# EAGLE board wa_psu (EAGLE 9.5.1)
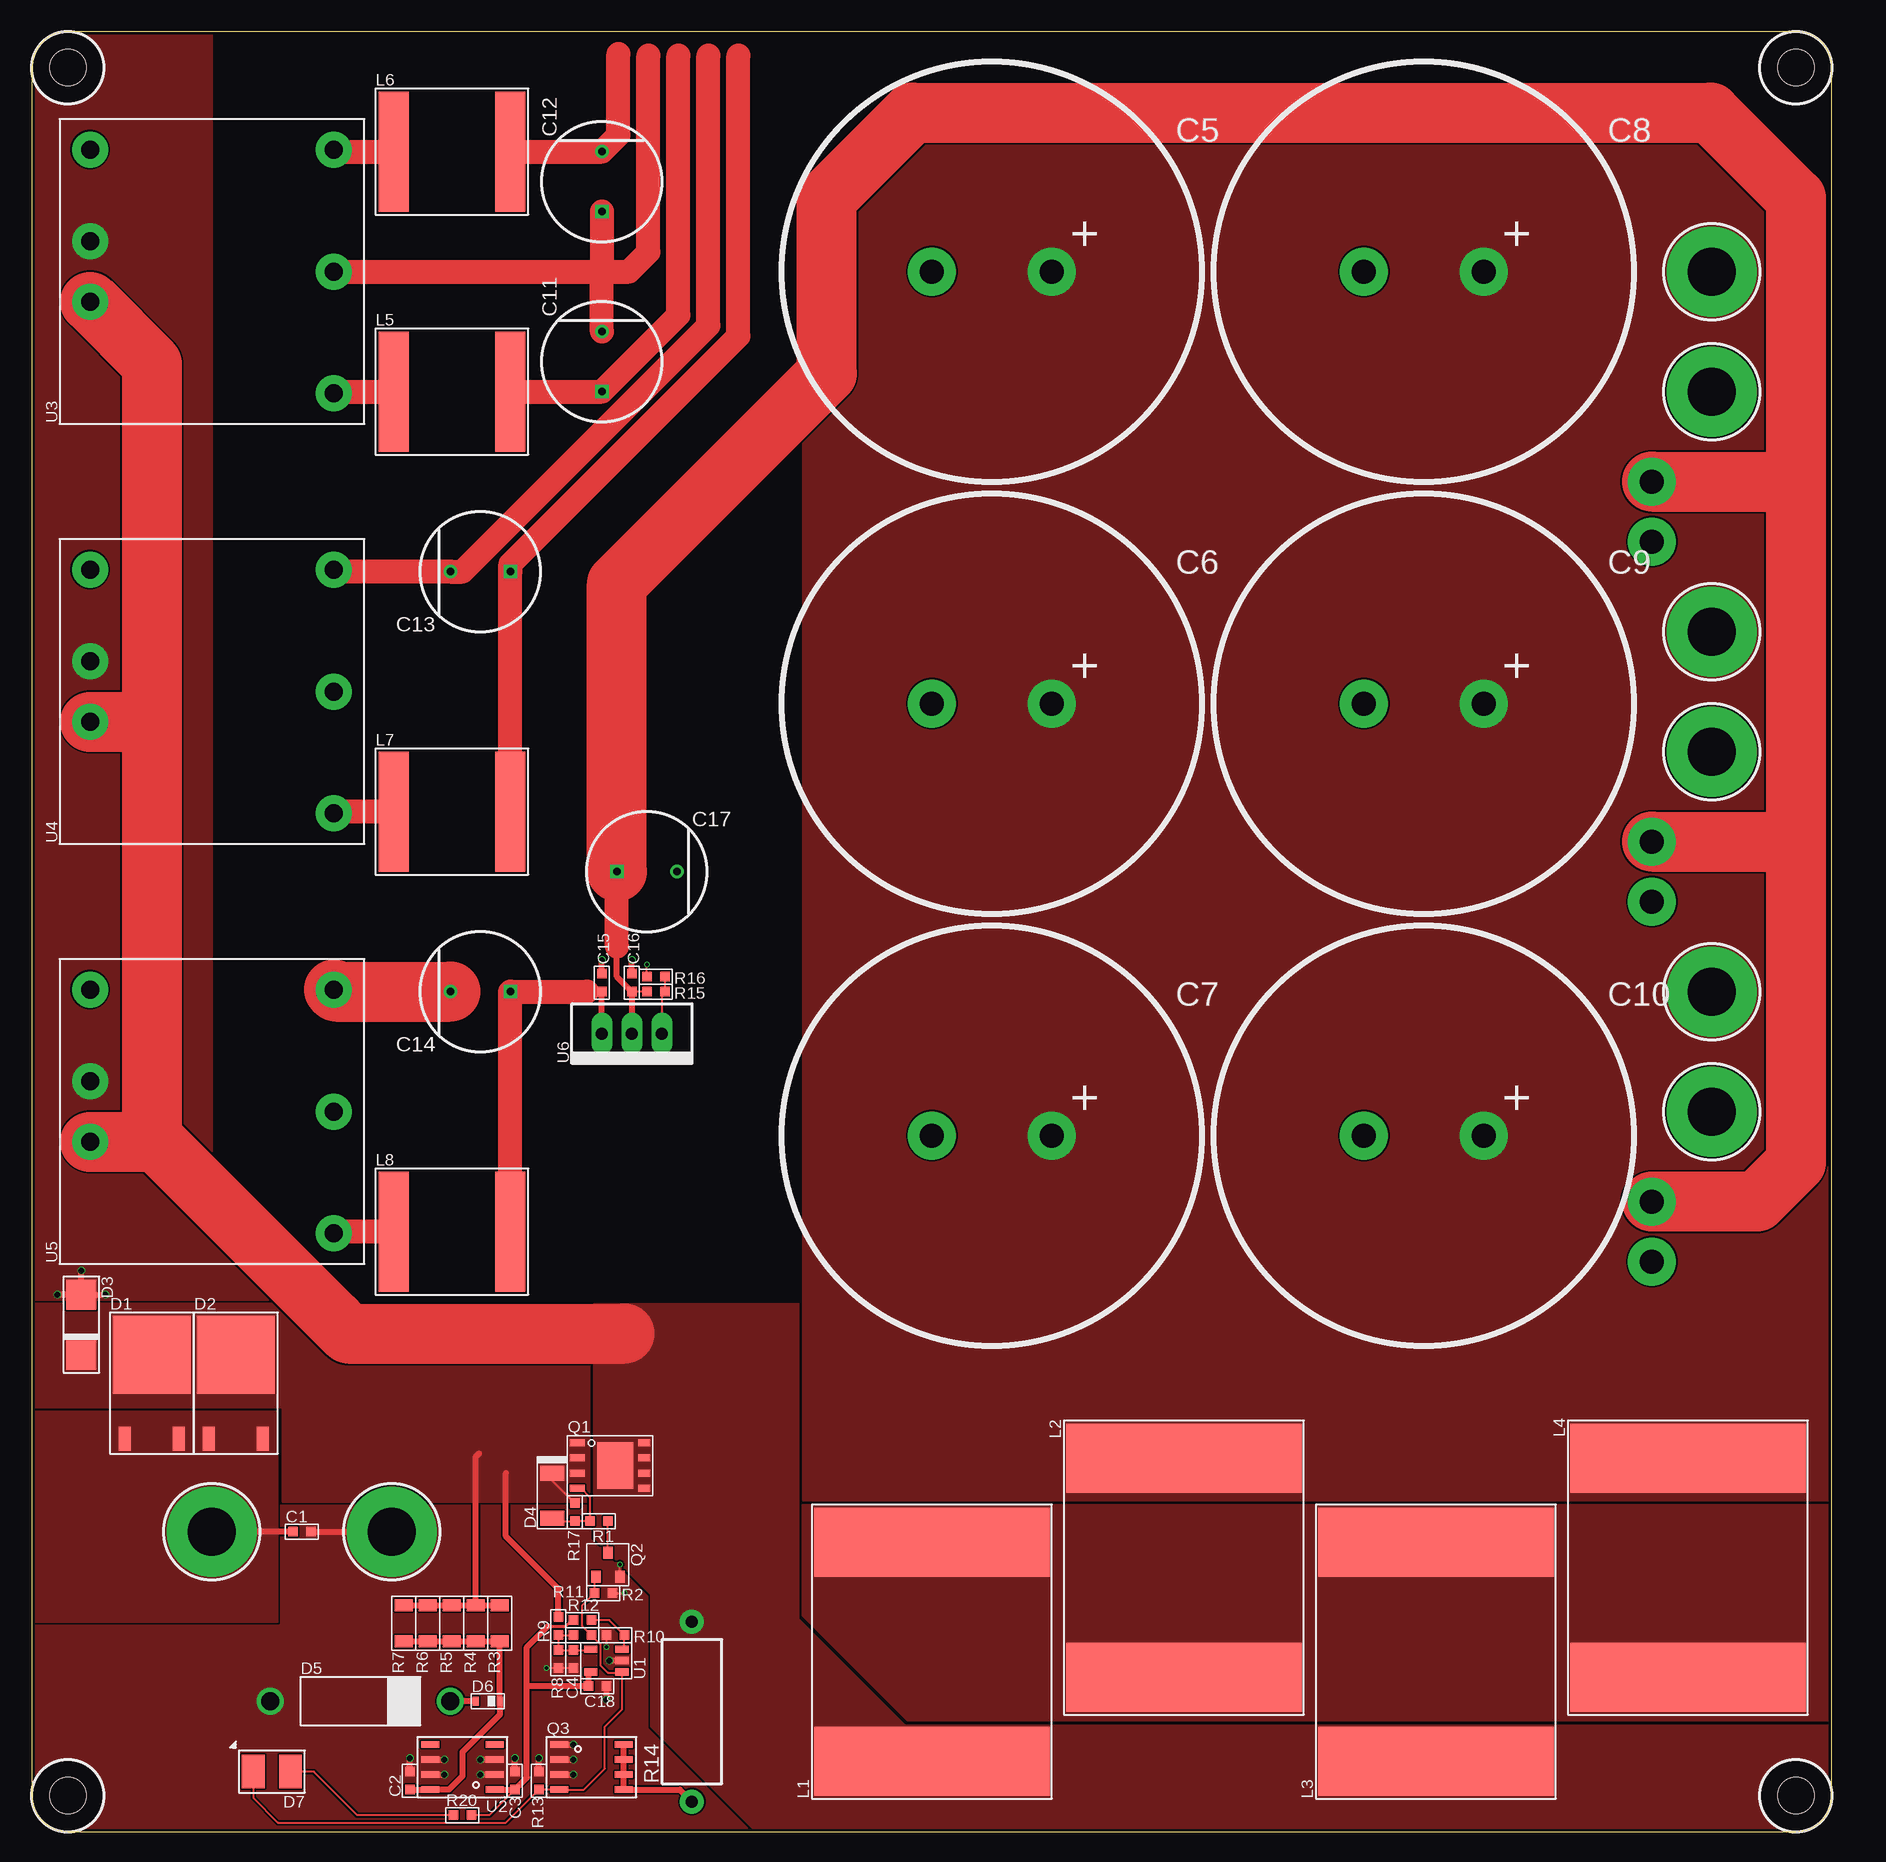
[diagram p0: board, top side]
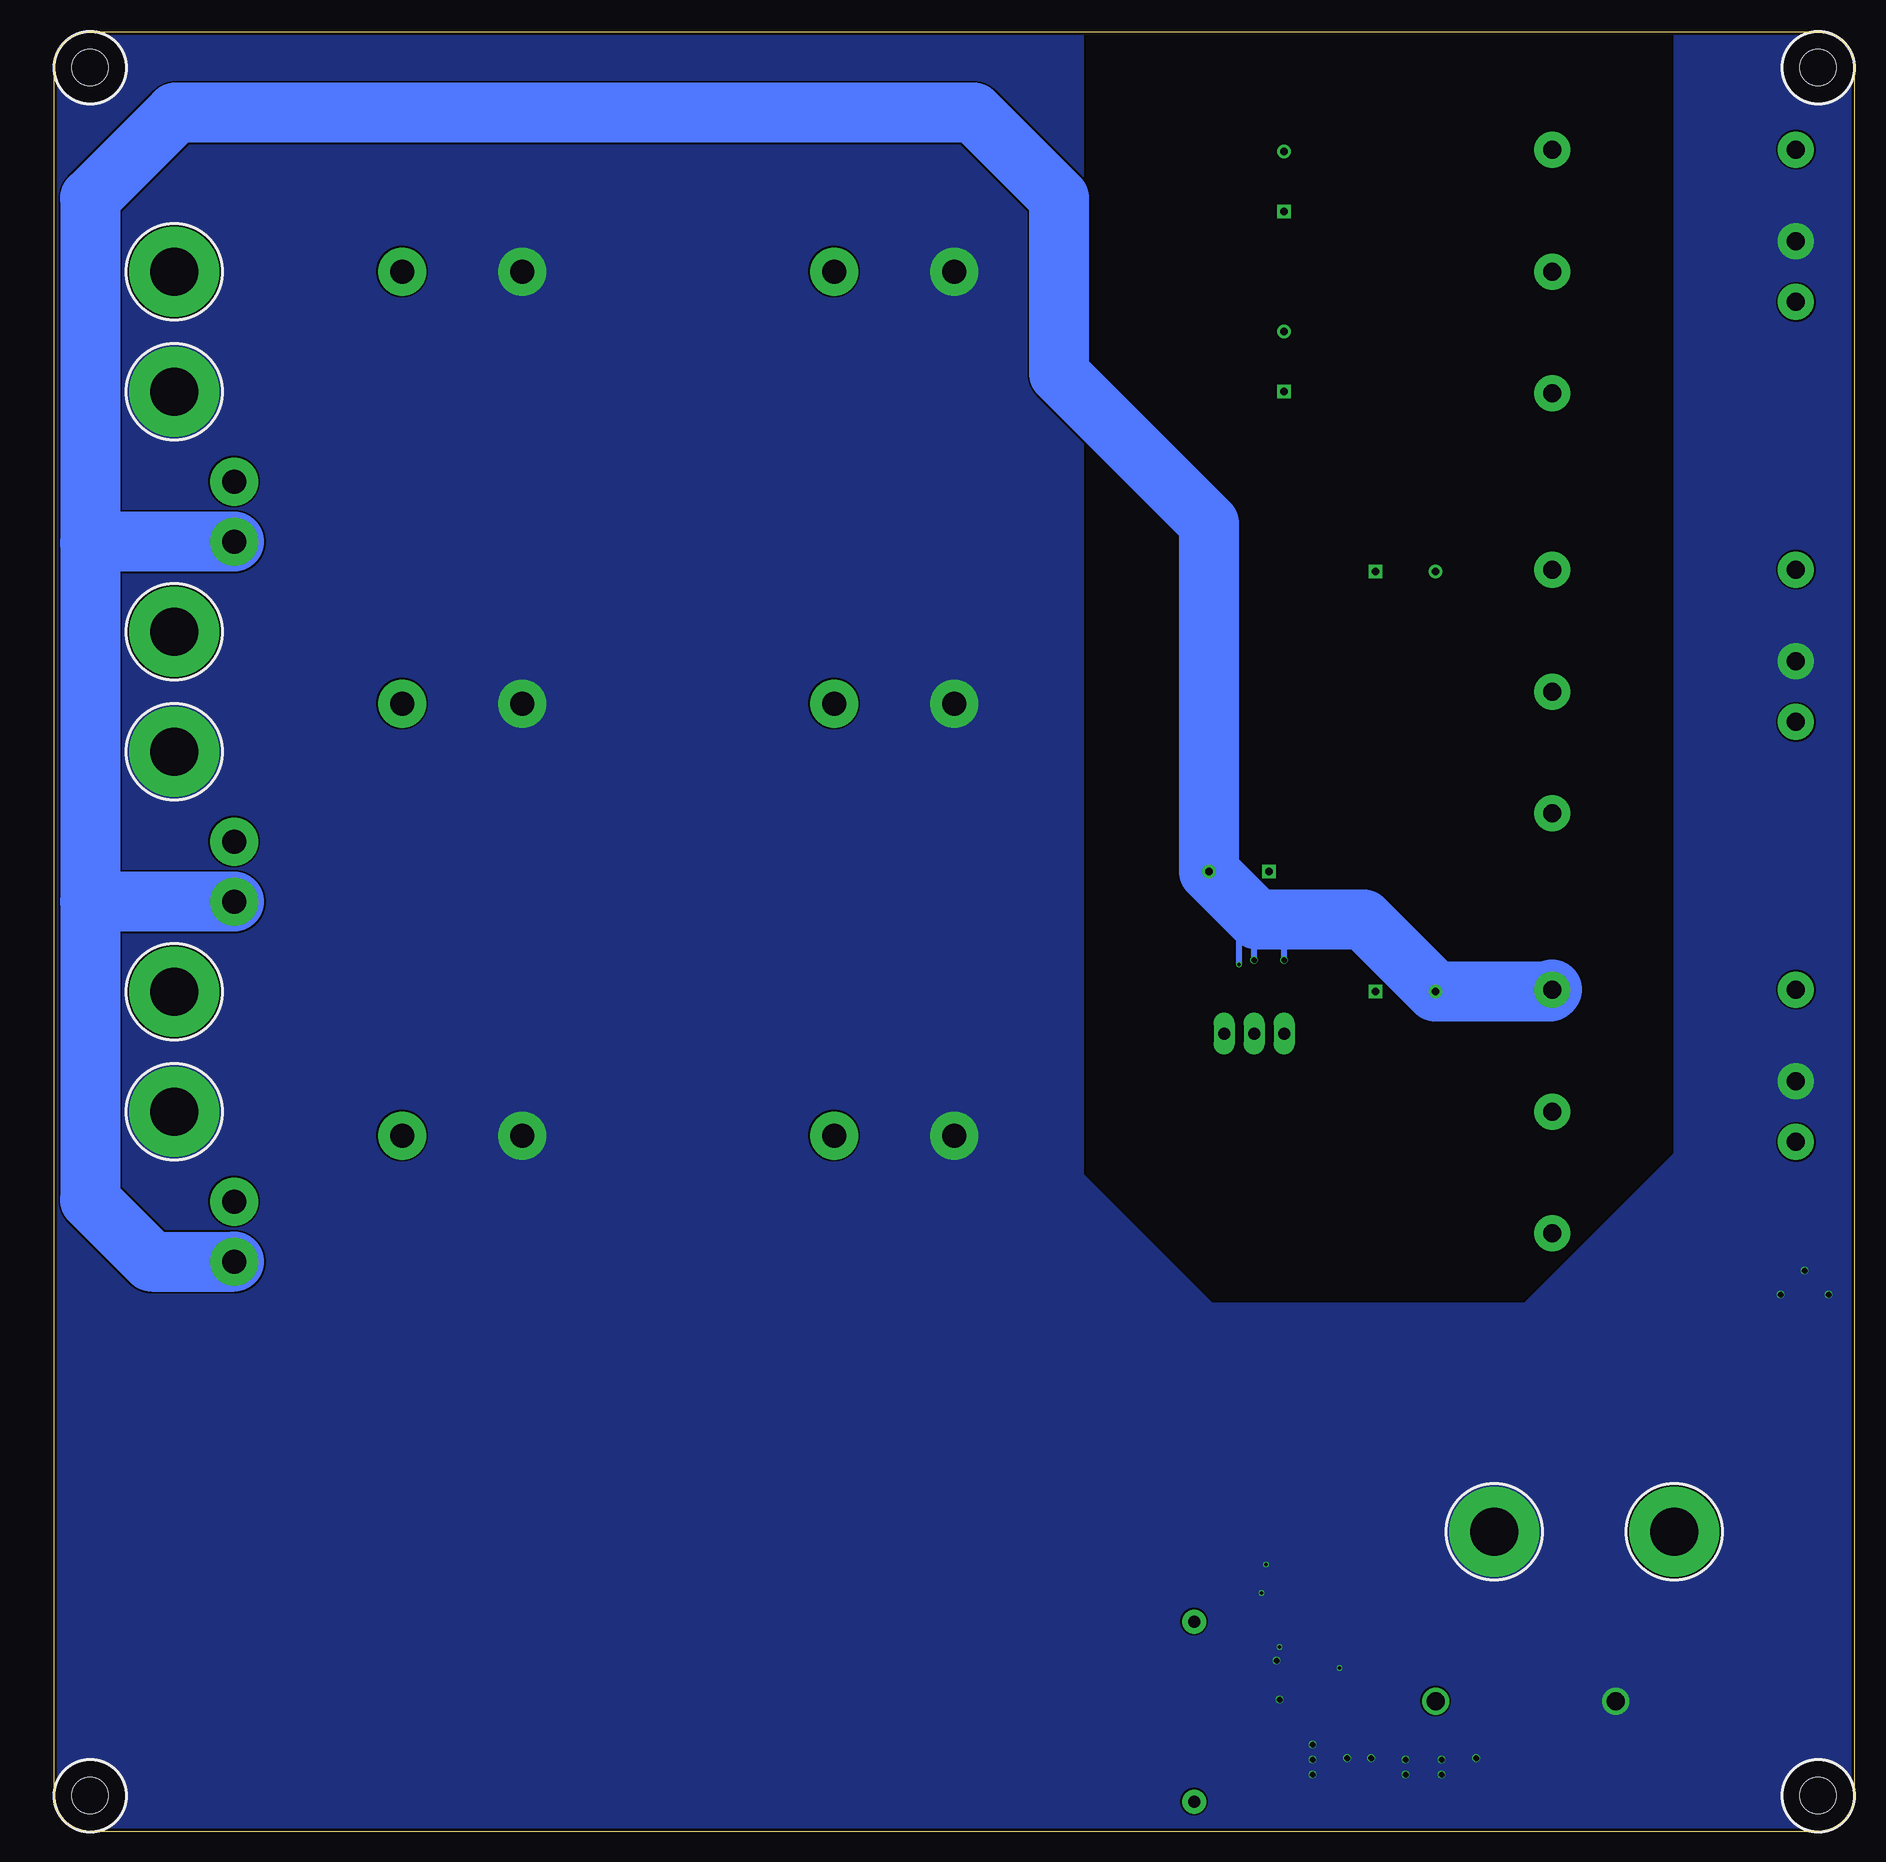
[diagram p1: board, bottom side, seen from below]

Size 150 x 150 mm. Coordinates in mm from the lower left corner, seen from the top.
Outline: 147,150 3,150 arc90 0,147 0,3 arc90 3,0 147,0 arc90 150,3 150,147 arc90 147,150
Copper layers (1*16): Top 0.035mm / dielectric 1.5mm / Bottom 0.035mm
Design rules "myDRC 2 layers": minimum track width 0.15mm, minimum drill 0.15mm, track to track 0.15mm, track to pad 0.15mm, pad to pad 0.15mm, via to via 0.15mm, smd to smd 0mil, copper to edge 0.25mm, drill to drill 0.25mm, minimum pad ring 10mil, minimum via ring 3mil, stop-mask expansion 4mil, vias tented up to drill 0.3mm, thermal gap 10mil

## Footprints (pad centres in the part's own frame; a part is rotated, then mirrored left to right if it is on the bottom)
0603 = smd 0.8 x 0.8: 1 -0.75,0; 2 0.75,0
35MM/10MMCAP = drill 2 pad 4: P$1 5,0; P$2 -5,0
10MM_RADIAL_5MM_PITCH = drill 0.6: 1 2.5,0 | drill 0.6 square: 2 -2.5,0
TO252 = smd 1 x 2: 1 -2.25,-5.25; 3 2.25,-5.25 | smd 6.5 x 6.5: 4 0,1.75
DO214AA = smd 2.5 x 2.5: A -2.5,0; K 2.5,0
SOD80 = smd 1.25 x 2: A 1.875,0; K -1.875,0
017AA-01 = drill 1.5: A -7.5,0; K 7.5,0
SOD_523 = smd 0.5 x 0.75: A -1,0; K 1,0
VLMT3100 = smd 1.9 x 2.8: A -1.55,0; K 1.55,0
MOUNTHOLE_8X4 = drill 4 pad 7.5: 1 0,0
4X2 = drill 2 pad 4: 1 0,0
PA4349.ZZZANLT = smd 5.75 x 19.6: 1 -9.125,0; 2 9.125,0
SRN1060 = smd 2.5 x 10: 1 -4.85,0; 2 4.85,0
MOUNTHOLE_6X3 = hole 3: 0,0
SO8_POWERPAK = smd 1.25 x 0.6: 1 -2.67,1.905; 2 -2.67,0.635; 3 -2.67,-0.635; 4 -2.67,-1.905 | smd 1 x 0.6: 5 2.92,0.635; 6 2.92,-0.635; 7 2.92,-1.905; 8 2.92,1.905 | smd 3 x 3.9: PAD 0.5,0
SOT23-3 = smd 0.8 x 1: 1 -1,-1; 2 0,1; 3 1,-1
SO8 = smd 1.5 x 0.55: 1 -2.7,1.875; 2 -2.7,0.625; 3 -2.7,-0.625; 4 -2.7,-1.875; 5 2.7,-1.875; 6 2.7,-0.625; 7 2.7,0.625; 8 2.7,1.875
1206 = smd 1 x 1.5: 1 1.5,0; 2 -1.5,0
15MM_TH = drill 1 pad 2: 1 -7.5,0; 2 7.5,0
SOT23-5 = smd 0.6 x 1.1: 1 0.95,1.3; 2 0,1.3; 3 -0.95,1.3; 4 -0.95,-1.3; 5 0.95,-1.3
PDQE10 = drill 1.5 pad 3: 1 2.54,10.16; 2 -2.54,10.16; 3 -10.16,-10.16; 4 0,-10.16; 5 10.16,-10.16; 6 10.16,10.16
TO220 = drill 1 pad 1.75 long: 1 -2.5,0; 2 0,0; 3 2.5,0

## Placement (x,y rotation side)
C1  100nF 100V  [0603]  22.5,25 180 top
C2  100nF 100V  [0603]  31.5,4.25 270 top
C3  10uF 10V  [0603]  40.25,4.25 270 top
C4  100nF 16V  [0603]  45.12,14.38 90 top
C5  15mF 63V  [35MM/10MMCAP]  80,130 0 top
C6  15mF 63V  [35MM/10MMCAP]  80,94 0 top
C7  15mF 63V  [35MM/10MMCAP]  80,58 0 top
C8  15mF 63V  [35MM/10MMCAP]  116,130 0 top
C9  15mF 63V  [35MM/10MMCAP]  116,94 0 top
C10  15mF 63V  [35MM/10MMCAP]  116,58 0 top
C11  25V 1000uF  [10MM_RADIAL_5MM_PITCH]  47.5,122.5 90 top
C12  25V 1000uF  [10MM_RADIAL_5MM_PITCH]  47.5,137.5 90 top
C13  25V 1000uF  [10MM_RADIAL_5MM_PITCH]  37.38,105 180 top
C14  25V 1000uF  [10MM_RADIAL_5MM_PITCH]  37.38,70 180 top
C15  1uF 25V  [0603]  47.5,70.75 270 top
C16  1uF 25V  [0603]  50,70.75 270 top
C17  25V 1000uF  [10MM_RADIAL_5MM_PITCH]  51.25,80 0 top
C18  100nF 16V  [0603]  47.12,12.12 180 top
D1  150V 35A  [TO252]  10,38 0 top
D2  150V 35A  [TO252]  17,38 0 top
D3  ES2D  [DO214AA]  4.12,42.25 270 top
D4  8V2  [SOD80]  43.38,28 270 top
D5  43V 5W  [017AA-01]  27.38,10.88 0 top
D6  BZX585-C10  [SOD_523]  38,10.88 0 top
D7  RED STATUS  [VLMT3100]  20,5 180 top
HOLE1  4mm ID  [MOUNTHOLE_8X4]  15,25 90 top
HOLE2  4mm ID  [MOUNTHOLE_8X4]  30,25 90 top
HOLE3  4mm ID  [MOUNTHOLE_8X4]  140,120 0 top
HOLE4  4mm ID  [MOUNTHOLE_8X4]  140,130 0 top
HOLE5  4mm ID  [MOUNTHOLE_8X4]  140,90 0 top
HOLE6  4mm ID  [MOUNTHOLE_8X4]  140,100 0 top
HOLE7  4mm ID  [MOUNTHOLE_8X4]  140,60 0 top
HOLE8  4mm ID  [MOUNTHOLE_8X4]  140,70 0 top
HOLE9  MOUNTHOLE_METAL4X2  [4X2]  135,107.5 0 top
HOLE10  MOUNTHOLE_METAL4X2  [4X2]  135,112.5 0 top
HOLE11  MOUNTHOLE_METAL4X2  [4X2]  135,77.5 0 top
HOLE12  MOUNTHOLE_METAL4X2  [4X2]  135,82.5 0 top
HOLE13  MOUNTHOLE_METAL4X2  [4X2]  135,47.5 0 top
HOLE14  MOUNTHOLE_METAL4X2  [4X2]  135,52.5 0 top
L1  PA4349.823ANLT  [PA4349.ZZZANLT]  75,15 90 top
L2  PA4349.823ANLT  [PA4349.ZZZANLT]  96,22 90 top
L3  PA4349.823ANLT  [PA4349.ZZZANLT]  117,15 90 top
L4  PA4349.823ANLT  [PA4349.ZZZANLT]  138,22 90 top
L5  470uH  [SRN1060]  35,120 0 top
L6  470uH  [SRN1060]  35,140 0 top
L7  470uH  [SRN1060]  35,85 0 top
L8  470uH  [SRN1060]  35,50 0 top
MECH1  6mm x 3mm  [MOUNTHOLE_6X3]  3,3 0 top
MECH2  6mm x 3mm  [MOUNTHOLE_6X3]  147,3 0 top
MECH3  6mm x 3mm  [MOUNTHOLE_6X3]  3,147 0 top
MECH4  6mm x 3mm  [MOUNTHOLE_6X3]  147,147 0 top
Q1  SI7489DP  [SO8_POWERPAK]  48.12,30.5 0 top
Q2  CPH3459  [SOT23-3]  48,22.25 0 top
Q3  SI4848ADY  [SO8]  46.62,5.38 0 top
R1  20k  [0603]  47.25,25.88 180 top
R2  10k  [0603]  47.62,19.88 180 top
R3  4k7  [1206]  39,17.38 270 top
R4  4k7  [1206]  37,17.38 270 top
R5  4k7  [1206]  35,17.38 270 top
R6  4k7  [1206]  33,17.38 270 top
R7  4k7  [1206]  31,17.38 270 top
R8  4.3k  [0603]  43.88,14.38 90 top
R9  82k  [0603]  43.88,17.12 90 top
R10  10k  [0603]  48.62,16.38 0 top
R11  10k  [0603]  45.88,17.62 180 top
R12  3.9k  [0603]  45.88,16.38 0 top
R13  10k  [0603]  42.25,4.25 270 top
R14  100R  [15MM_TH]  55,10 90 top
R15  240R  [0603]  52,70 180 top
R16  2.0k  [0603]  52,71.25 0 top
R17  100k  [0603]  45.25,26.62 270 top
R20  1.0k  [0603]  35.88,1.38 0 top
U1  LMV7219  [SOT23-5]  47.88,14.25 270 top
U2  LM2936  [SO8]  35.88,5.38 180 top
U3  DCDC +/-15V  [PDQE10]  15,130 90 top
U4  DCDC 15V  [PDQE10]  15,95 90 top
U5  DCDC 15V  [PDQE10]  15,60 90 top
U6  LM317  [TO220]  50,66.5 180 top

## Library data of the parts
C1 C2 = CAPACITORS; DIGIKEY: 478-10047-1-ND; HEIGHT: 1; PRICE_PER: 0.14
C3 = CAPACITORS; DIGIKEY: 490-10474-1-ND; HEIGHT: 0.95; PRICE_PER: 0.17
C4 C18 = CAPACITORS; DIGIKEY: 1276-6582-1-ND; HEIGHT: 1; PRICE_PER: 0.08
C5-C10 = PASSIVES
C11-C14 C17 = CAPACITORS; DIGIKEY: 1189-1245-ND; HEIGHT: 22; PRICE_PER: 0.53
C15 C16 = CAPACITORS; DIGIKEY: 1276-1102-1-ND; HEIGHT: 1; PRICE_PER: 0.08
D1 D2 = DIODES; DIGIKEY: V35PW15-M3/IGICT-ND; HEIGHT: 3; PRICE_PER: 0.97
D3 = DIODES; DIGIKEY: ES2DFSCT-ND; HEIGHT: 2.5; PRICE_PER: 0.32
D4 = DIODES; DIGIKEY: BZT55C8V2-GS08GICT-ND; HEIGHT: 2; PRICE_PER: 0.16
D5 = DIODES; FARNELL: 9558241; PRICE_PER: 0.323
D6 = DIODES; FARNELL: 1907632; PRICE_PER: 0.08
D7 = OPTO; DIGIKEY: VLMT3100-GS08CT-ND; HEIGHT: 2; PRICE_PER: 0.225
HOLE1-HOLE8 = MISC; PRICE_PER: 0
HOLE9-HOLE14 MECH1-MECH4 = MISC
L1-L4 = INDUCTORS
L5-L8 = INDUCTORS; DIGIKEY: SRN1060-471MCT-ND; HEIGHT: 6; PRICE_PER: 0.72
Q1 = TRANSISTORs; DIGIKEY: SI7489DP-T1-E3CT-ND; HEIGHT: 2; PRICE_PER: 2.16
Q2 = TRANSISTORs; DIGIKEY: CPH3459-TL-WOSCT-ND; HEIGHT: 1.2; PRICE_PER: 0.4
Q3 = TRANSISTORs; DIGIKEY: SI4848ADY-T1-GE3CT-ND; HEIGHT: 2; PRICE_PER: 0.61
R1 = r_0603; DIGIKEY: P20.0KHCT-ND; PRICE_PER: 0.10000
R2 R10 R11 R13 = r_0603; DIGIKEY: P10.0KHCT-ND; PRICE_PER: 0.10000
R3-R7 = RESISTORS; FARNELL: 1739021; HEIGHT: 0.65; PRICE_PER: 0.1706
R8 = r_0603; DIGIKEY: P4.30KHCT-ND; PRICE_PER: 0.10000
R9 = r_0603; DIGIKEY: P82.0KHCT-ND; PRICE_PER: 0.10000
R12 = r_0603; DIGIKEY: P3.90KHCT-ND; PRICE_PER: 0.10000
R14 = RESISTORS; DIGIKEY: P100W-3CT-ND; HEIGHT: 5; PRICE_PER: 0.38
R15 = r_0603; DIGIKEY: P240HCT-ND; PRICE_PER: 0.10000
R16 = r_0603; DIGIKEY: P2.00KHCT-ND; PRICE_PER: 0.10000
R17 = r_0603; DIGIKEY: P100KHCT-ND; PRICE_PER: 0.10000
R20 = r_0603; DIGIKEY: P1.00KHCT-ND; PRICE_PER: 0.10000
U1 = ICs; DIGIKEY: LMV7219M5/NOPBCT-ND; HEIGHT: 1.2; PRICE_PER: 1.96
U2 = ICs; DIGIKEY: LM2936HVMAX-5.0/NOPBCT-ND; HEIGHT: 1.5; PRICE_PER: 1.56
U3 = ICs; DIGIKEY: 102-4868-ND; HEIGHT: 12; PRICE_PER: 13.64
U4 U5 = ICs; DIGIKEY: PDQE10-Q48-S15-D; HEIGHT: 12; PRICE_PER: 12.18
U6 = ICs; DIGIKEY: 497-1575-5-ND; HEIGHT: 19; PRICE_PER: 0.5

## Nets
5V: C3.2 C18.2 R11.2 R20.2 U1.5 U2.1
AMP_12V: C16.2 C17.2 HOLE10.1 HOLE12.1 HOLE14.1 R15.2 U6.2
DSP_AGND: C11.1 C12.2 U3.4
DSP_DGND: C13.1 U4.5
DSP_VA+: C11.2 L5.2
DSP_VA-: C12.1 L6.2
DSP_VD+: C13.2 L7.2
GND: C1.1 C2.1 C3.1 C4.1 C5.P$2 C6.P$2 C7.P$2 C8.P$2 C9.P$2 C10.P$2 C18.1 D3.A D5.A HOLE2.1 HOLE3.1 HOLE5.1 HOLE7.1 Q2.3 Q3.1 Q3.2 Q3.3 R2.1 R8.1 R10.1 R13.1 U1.2 U2.2 U2.3 U2.6 U2.7 U3.1 U4.1 U5.1
N$1: C1.2 D1.1 D1.3 D2.1 D2.3 HOLE1.1
N$2: C4.2 R8.2 R9.1 R12.1 U1.4
N$3: D4.A Q1.4 R1.2 R17.2
N$4: L1.2 L2.1 L3.2 L4.1
N$5: Q2.2 R1.1
N$6: D5.K D6.A
N$7: C2.2 D6.K R3.1 R4.1 R5.1 R6.1 R7.1 U2.8
N$8: D1.4 D2.4 D3.K D4.K Q1.1 Q1.2 Q1.3 R3.2 R4.2 R5.2 R6.2 R7.2 R9.2 R17.1
N$9: R10.2 R11.1 U1.3
N$11: D7.A R20.1
N$12: L5.1 U3.3
N$13: L6.1 U3.5
N$14: R15.1 R16.2 U6.1
N$18: C14.2 C15.2 L8.2 U6.3
N$20: L8.1 U5.3
N$22: L7.1 U4.3
N$23: Q3.5 Q3.6 Q3.7 Q3.8 R14.1
PGND: C14.1 C15.1 C16.1 C17.1 HOLE9.1 HOLE11.1 HOLE13.1 R16.1 U5.5
PSU_VIN_OVERVOLT: D7.K Q2.1 Q3.4 R2.2 R12.2 R13.2 U1.1
VIN: L1.1 L3.1 Q1.5 Q1.6 Q1.7 Q1.8 Q1.PAD R14.2 U3.2 U4.2 U5.2
VOUT: C5.P$1 C6.P$1 C7.P$1 C8.P$1 C9.P$1 C10.P$1 HOLE4.1 HOLE6.1 HOLE8.1 L2.2 L4.2

## Tracks (layer width: path | path; a pad name or v marks a point on that pad's centre or on a via)
5V
  Top 0.15: C3.2 38.12,1.38 R20.2
  Top 0.25: R11.2 45,17.62 44.5,17.12 43,17.12
  Top 0.5: U2.1 C3.2 41.25,4.5 41.25,12 | U1.5 46.38,13.1 C18.2 41.38,12.12 41.25,12 | 41.25,12 41.25,15.38 43,17.12
AMP_12V
  Top 0.15: R15.2 C16.2
  Top 0.5: U6.2 C16.2 48.75,71.25 48.75,73.75
  Top 2: 48.75,73.75 C17.2
  Top 5: C17.2 48.75,104 66.25,121.5 66.25,136.12 73.38,143.25 139.88,143.25 147,136.12 147,112.5 | 147,112.5 147,82.5 | HOLE10.1 147,112.5 | HOLE12.1 147,82.5 | HOLE14.1 143.75,52.5 147,55.75 147,82.5
DSP_AGND
  Top 2: U3.4 47.5,130 | 47.5,130 49.75,130 51.38,131.62 51.38,148 | C11.1 47.5,130 | C12.2 47.5,130
DSP_DGND
  Top 2: 56.38,148 56.38,125.5 35.88,105 C13.1 25.32,105 U4.5
DSP_VA+
  Top 2: L5.2 C11.2 53.88,126.38 53.88,148
DSP_VA-
  Top 2: L6.2 C12.1 48.88,141.38 48.88,148.12
DSP_VD+
  Top 2: L7.2 39.85,99.97 C13.2 39.88,105.62 58.88,124.62 58.88,148
GND  (via drill 0.3, 0.5)
  Top 0.15: v42.88,13.62 R8.1 C4.1 | R10.1 v47.88,15.38 | Q2.3 v49,22.25 | R2.1 v49.38,19.88
  Top 0.5: U2.7 v34.38,4.75 | U2.6 v34.38,6 | C2.1 v31.5,6.12 | U2.2 v37.38,4.75 | U2.3 v37.38,6 | C3.1 v40.25,6.12 | U1.2 v48.12,14.25 | C18.1 v47.88,11 | Q3.1 v45.12,7.25 | Q3.2 v45.12,6 | Q3.3 v45.12,4.75 | R13.1 v42.25,6.12 | D3.A v6.12,44.75 | D3.A v2.12,44.75 | D3.A v4.12,46.75 | C1.1 HOLE2.1
  pour Bottom (no thermals): 15,150 15,56.5 27.5,44 53.5,44 64.25,54.75 64.25,150 150,150 150,0 0,0 0,150
  pour Top (rank 6, no thermals): 15,150 15,56.5 27.5,44 53.5,44 64.12,54.62 64.12,150 150,150 150,0 0,0 0,150
N$1
  Top 0.5: C1.2 HOLE1.1
  pour Top (no thermals): 0,17.5 20.5,17.5 20.5,35 0,35
N$2
  Top 0.15: U1.4 46.5,15.12 C4.2 R8.2 R9.1 R12.1
N$3
  Top 0.15: D4.A 43.62,25.88 R17.2 45.88,25.88 R1.2 46.5,27.88 45.78,28.59 Q1.4 45.83,28.59 45.88,28.55
N$4
  pour Top (no thermals): 64.25,27.25 150,27.25 150,9.25 73,9.25 64.25,18
N$5
  Top 0.15: Q2.2 R1.1
N$6
  Top 0.5: D6.A D5.K
N$7
  Top 0.5: R7.1 R6.1 R5.1 R4.1 R3.1 D6.K 39,9.75 35.88,6.62 35.88,4.62 34.75,3.5 U2.8 C2.2
N$8
  Top 0.15: R17.1 43.38,29.25 D4.K
  Top 0.5: R7.2 R6.2 R5.2 R4.2 | R4.2 R3.2 | R4.2 37,31.25 37.25,31.5 | R9.2 43.88,20.25 39.5,24.62 39.5,29.88
  pour Top (no thermals): 0,35.38 20.88,35.38 20.88,27.5 46.5,27.5 46.5,41 24.25,41 21.25,44 0,44
N$9
  Top 0.15: U1.3 49.38,15.4 49.38,16.12 R10.2 48.12,17.62 R11.1
N$11
  Top 0.15: R20.1 27.12,1.38 23.5,5 D7.A
N$12
  Top 2: U3.3 25.32,120 L5.1
N$13
  Top 2: U3.5 25.32,140 L6.1
N$14
  Top 0.15: R16.2 R15.1 52.5,69.75 U6.1
N$18
  Top 0.5: U6.3 C15.2 46.25,70
  Top 2: L8.2 39.85,69.97 C14.2 46.25,70
N$20
  Top 2: L8.1 25.32,50 U5.3
N$22
  Top 2: L7.1 25.32,85 U4.3
N$23
  Top 0.5: R14.1 54,3.5 Q3.5 Q3.6 Q3.7 Q3.8
PGND  (via drill 0.3, 0.5)
  Top 0.15: R16.1 v51.25,72.25
  Top 0.5: C15.1 v47.5,72.62 | C16.1 v50,72.62
  Top 5: U5.5 25.32,70 C14.1
  Bottom 0.5: v47.5,72.62 47.5,73.75 49.75,76 | v50,72.62 50,75.75 49.75,76 | v51.25,72.25 51.25,74.5 49.75,76
  Bottom 5: U5.5 25.32,70 C14.1 40.88,76 49.75,76 C17.1 53.75,109 66.25,121.5 66.25,136.12 73.38,143.25 139.88,143.25 147,136.12 147,107.38 | 147,107.38 147,77.5 | HOLE9.1 146.88,107.5 147,107.38 | HOLE11.1 147,77.5 | HOLE13.1 141.88,47.5 147,52.62 147,77.5
PSU_VIN_OVERVOLT
  Top 0.15: Q2.1 46.88,21.12 R2.2 45.88,18.88 45.88,17.12 R12.2 47.38,15.62 47.38,13.88 48,13.25 49.12,13.25 U1.1 49.17,10.18 47.75,8.75 47.75,5.25 46,3.5 Q3.4 R13.2 39.5,0.75 20.5,0.75 18.45,2.8 D7.K
VIN
  Top 5: U3.2 10,122.3 10,92.5 | 10,92.5 10,86.62 10,57.88 | 10,57.88 25.25,42.62 26.38,41.5 49.38,41.5 | U4.2 9.96,92.46 10,92.5 | U5.2 9.59,57.46 10,57.88
  pour Top (no thermals): 46.88,44 63.88,44 63.88,17.75 72.75,8.88 150,8.88 150,0 60.38,0 51.62,8.75 51.62,19.75 46.88,24.5
VOUT
  pour Top (no thermals): 64.25,27.62 150,27.62 150,150 64.25,150